# Altium PCB HM_RETI_Ambilight_v1_0.PcbDoc
Units mm, origin at the board's own origin, x right, y up, seen from the top; angles counter-clockwise.
Board outline 104.27 x 57.67 mm, 2 copper layers (Top Layer, Bottom Layer), stack 0.325 mm thick; 14 components, 11 nets, 87 pads, 2 vias.
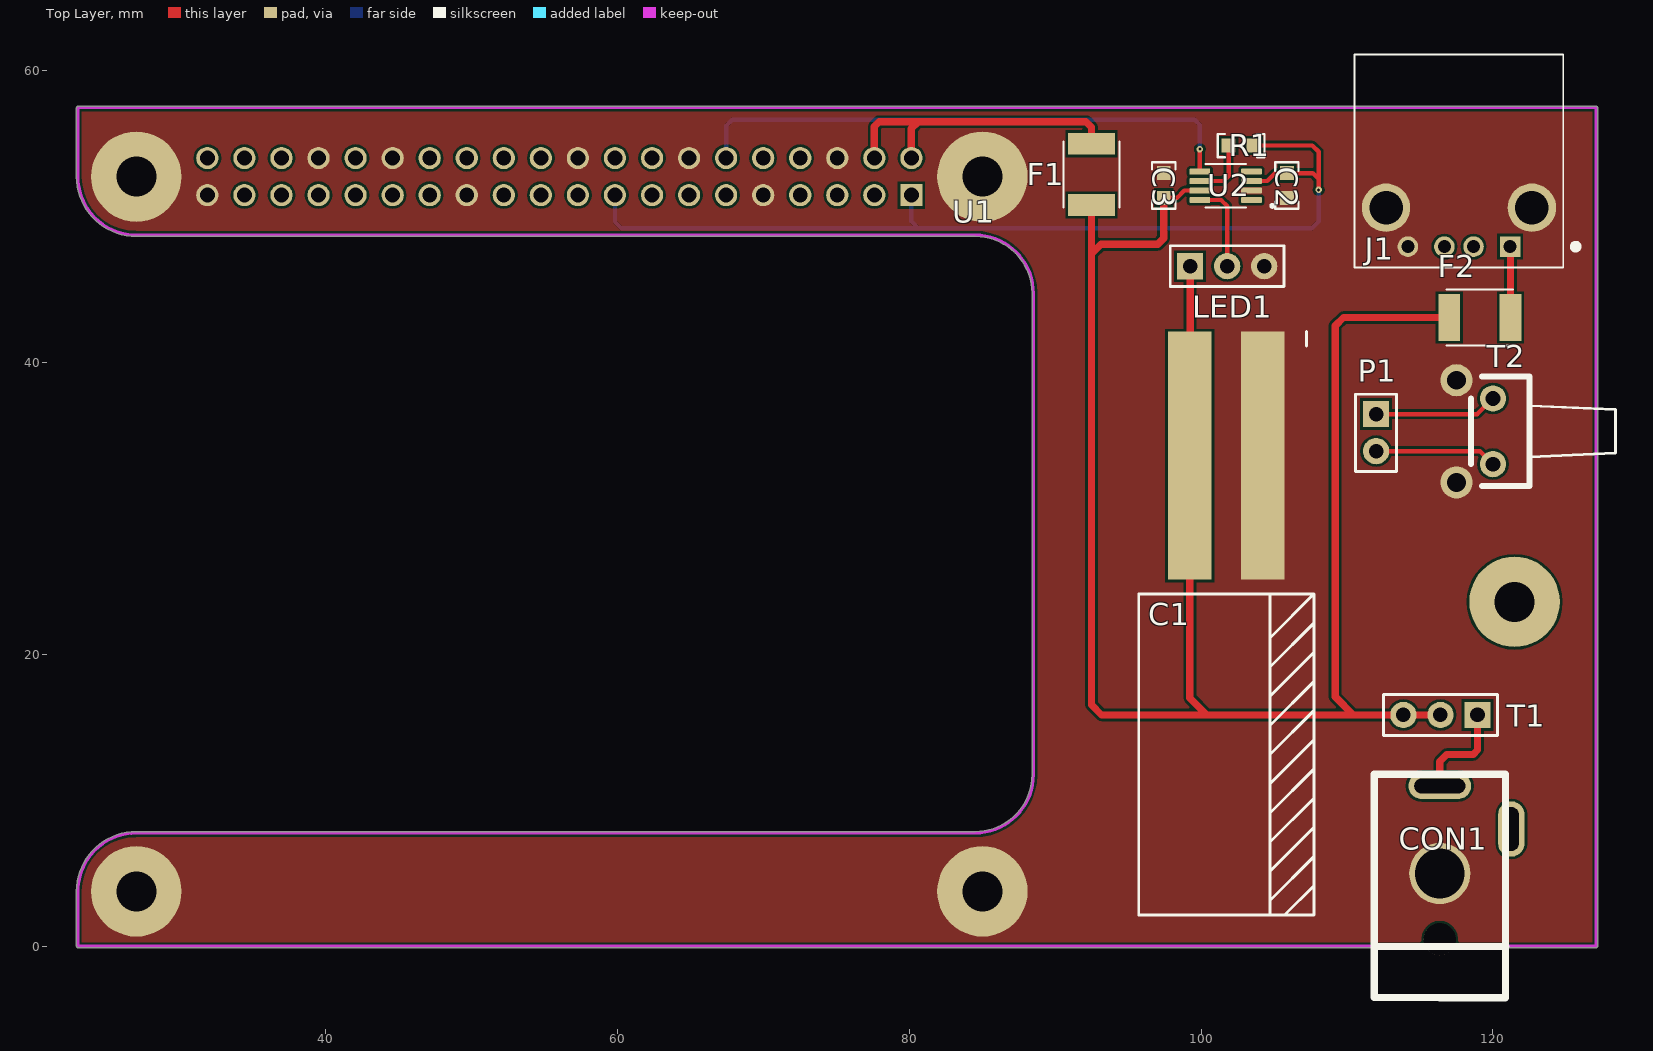
[diagram p0: Top Layer view]
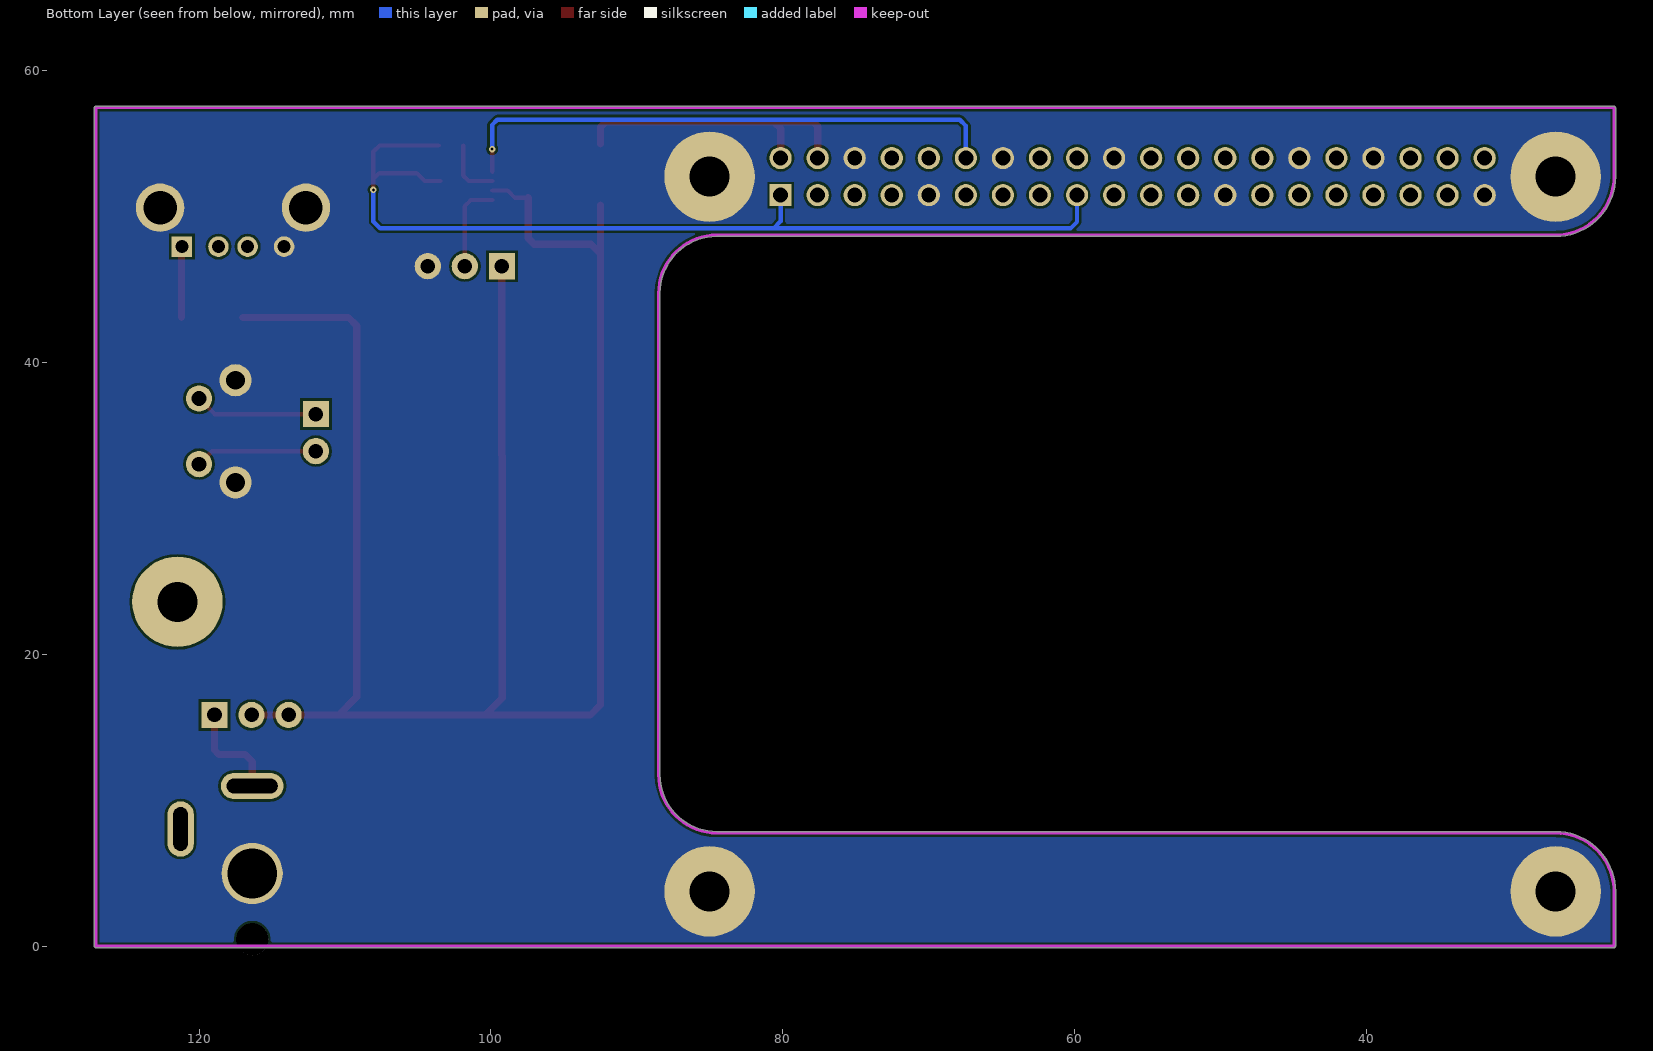
[diagram p1: Bottom Layer view, seen from below]
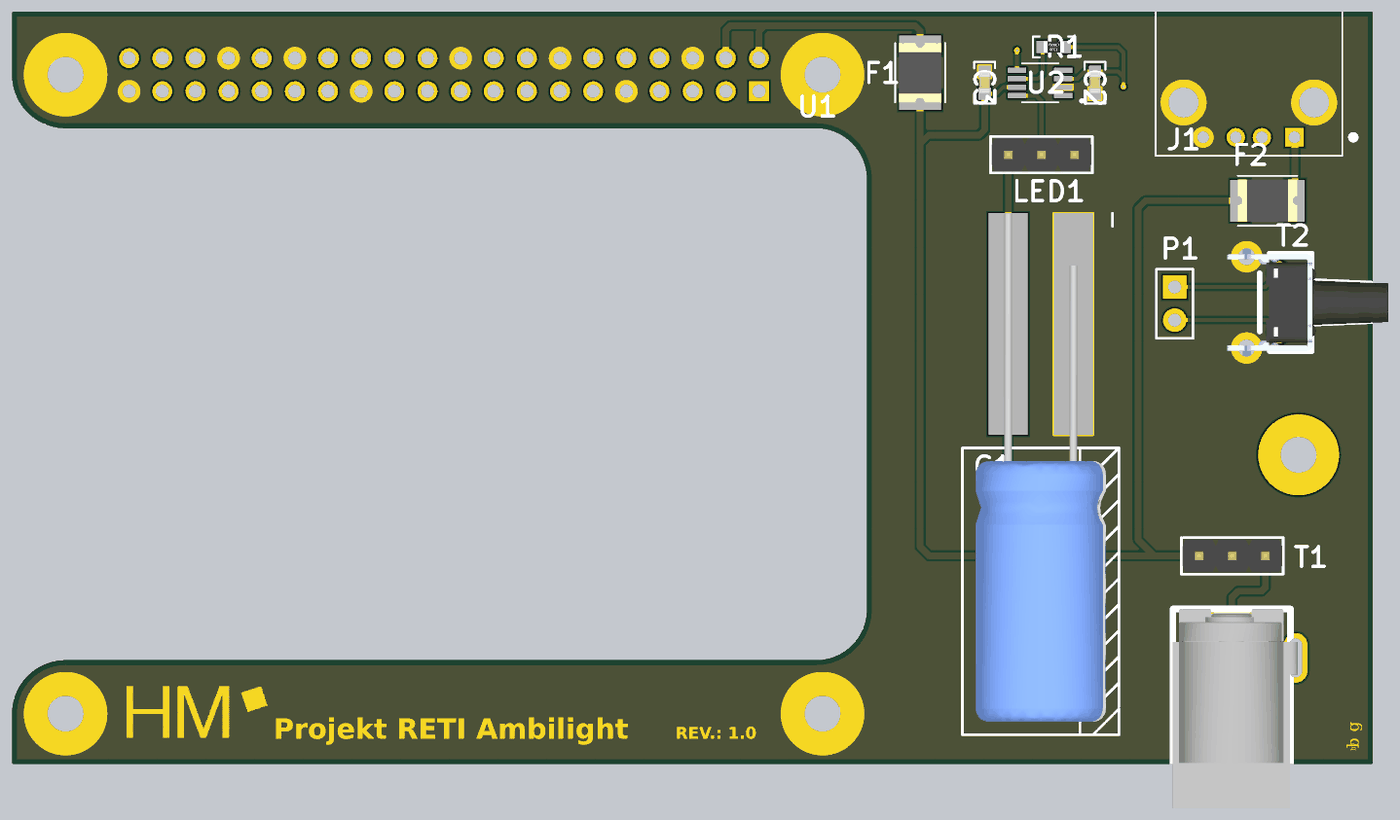
[diagram p2: 3D render of the assembled board from above, using the file's embedded part models]

## Layer stack, top to bottom
Top Solder: solder mask 0.0102, Solder Resist, Dk 3.5
Top Layer: signal copper 0.0356
Dielectric 1: core 0.254, FR-4, Dk 4.2
Bottom Layer: signal copper 0.0356
Bottom Solder: solder mask 0.0102, Solder Resist, Dk 3.5

## Board outline
22.916,0.015 cw(c23.015,0.03) 22.914,0.03 22.914,3.75 cw(c27.015,3.75) 27.015,7.851 cw(c27.015,7.75) 27.021,7.85 84.515,7.85 ccw(c84.515,11.75) 88.415,11.75 88.415,44.75 ccw(c84.515,44.75) 84.52,48.65 cw(c84.515,48.75) 84.515,48.65 27.021,48.65 cw(c27.015,48.75) 27.015,48.649 cw(c27.015,52.75) 22.914,52.75 22.914,57.47 cw(c23.015,57.47) 23.015,57.57 127.08,57.57 cw(c127.08,57.47) 127.18,57.47 127.18,0 cw(c127.08,0) 127.08,-0.1 23.015,-0.1 cw(c23.015,0)

## Design rules (kind name [scope] priority, off if disabled: settings)
Clearance [All] p1: gap=0.17
ComponentClearance [All] p1 off: gap=0.254 collisioncheckmode=3 verticalgap=0.254 showdistances=FALSE
Height [All] p1 off: minheight=0 maxheight=25.4 prefheight=12.7
HoleSize [All] p1: absolutevalues=TRUE maxlimit=5 minlimit=0.025 maxpercent=80.000 minpercent=20.000
MinimumSolderMaskSliver [All] p1: minsoldermaskwidth=0
PlaneClearance [All] p1: clearance=0.25
PlaneConnect [All] p1: planeconnectstyle=Direct reliefexpansion=0.508 reliefentries=4 reliefconductorwidth=0.254 reliefairgap=0.254
PolygonConnect [All] p1: connectstyle=Direct reliefconductorwidth=0.254 reliefentries=4 polygonreliefangle="90 Angle" airgapwidth=0.254
RoutingVias [All] p1: holewidth=0.2 width=0.45 viastyle="Through Hole" minholewidth=0.2 minwidth=0.45 maxholewidth=1 maxwidth=2
SilkToSilkClearance [All] p1: silktosilkclearance=0
SilkToSolderMaskClearance [IsPad] p1: minsilkscreentomaskgap=0 clearancetoexposedcopper=TRUE
SolderMaskExpansion SolderMaskExpansion_1 [IsVia] p1: expansion=-1
SolderMaskExpansion [All] p2: expansion=0.102
Width [All] p1: maxlimit=4 minlimit=0.12 preferedwidth=0.15 minimp=50.000000 maximp=50.000000 favimp=50.000000
22 further rules are at their usual default settings.

## Components (designator, comment, footprint, x,y, rotation, side; value= is the part's Value field where it differs from the comment)
C1 "1000uF" C_10mm_left 101.73,33.13 r180 top
C2 "100nF" C_0603 105.89,52.14 r270 top
C3 "100nF" C_0603 97.44,52.14 r90 top
CON1 "DC-BUCHSE" DC_BUCHSE_LUMBERG_2_35MM_STIFT 116.36,-3.53 r270 top
F1 "MF-MSMF250/16X-2" FUSER_MF-MSMF250/16X-2 92.49,52.9 r270 top
F2 "MF-MSMF110/16-2" FUSER_MF-MSMF250/16X-2 119.11,43.09 r180 top
J1 "UJ2-AH-4-TH" CUI_UJ2-AH-4-TH 121.18,47.95 r180 top
LED1 "Pin Header 3x1" "HEADER 3X1" 101.79,46.61 r0 top
P1 "Pin Header 2x1" "Header 2x1" 112,35.13 r270 top
R1 "1k" R_0603 102.74,54.88 r180 top
T1 "Pin Header 3x1" "Header 3x1" 116.41,15.85 r180 top
T2 "TASTER_RESET" 431256058736 120.01,35.29 r270 top
U1 "RASPBERRY_PI_3_MODEL_B+" MODULE_RASPBERRY_PI_3_MODEL_B+ 44.34,28.25 r0 top locked
U2 "TXS0102DCTT" SOP65P400X130-8N 101.69,52.12 r180 top

## Footprints (in the part's own frame and the unit in brackets; to place one, negate y for a bottom-side part, rotate by r counter-clockwise, add the part's x,y. Pads: shape width x height; smd on the part's side, far side on the other; paste and mask are expansions set on the pad)
431256058736 [mm] "Taster 90° 8,35mm"
  round 2.2 hole 1.3: BLECH1(-3.5,-2.5) BLECH2(3.5,-2.5)
  round 1.8 hole 1: PIN1(-2.25,0) PIN2(2.25,0)
  silkscreen extent -3.75,-1.5 3.75,8.4, body extent -4.2,-4 4.2,8.35, height 7.2
C_10mm_left [mm] "C_10mm, P=5mm"
  rect 3x17 smd: 1(2.5,-0.5) 2(-2.5,-0.5)
  silkscreen extent -6,-9 6,31, body extent -5,-8.99 5,29.99, height 10.24
C_0603 [mm] "C_0603"
  rect 0.95x0.95 smd: 1(-0.848,0) 2(0.848,0)
  silkscreen extent -1.6,-0.8 1.6,0.8, body extent -0.8,-0.4 0.8,0.4, height 0.79
CUI_UJ2-AH-4-TH [mm]
  rect 1.408x1.408 / inner round 1.408 / far side rect 1.408x1.408 hole 0.9: 1(0,0)
  round 1.408 hole 0.9: 2(2.5,0) 3(4.5,0) 4(7,0)
  round 3.316 hole 2.3: SH1(-1.5,-2.67) SH2(8.5,-2.67)
  silkscreen extent -4.7,-13.17 10.65,1.43
DC_BUCHSE_LUMBERG_2_35MM_STIFT [mm]
  round 2.2 hole 2.2 paste+0 mask+0.05: 0(-4,0)
  oval 1.8x4.3 hole 1 slot 3.5 at 90 deg paste+0 mask+0.05: 1(-14.51,0.01)
  oval 3.8x1.8 hole 1 slot 3 at 0 deg paste+0 mask+0.05: 2(-11.56,4.91)
  round 4.2 hole 3.4 paste+0 mask+0.05: 3(-8.51,0.01)
  silkscreen extent -15.31,-4.49 0,4.52, body extent -15.3,-4.52 0.01,5.08, height 11.05
FUSER_MF-MSMF250/16X-2 [mm]
  rect 1.5x3.2 smd: 1(-2.1,0) 2(2.1,0)
  silkscreen extent -2.27,-1.91 2.27,1.91, body extent -2.27,-1.62 2.27,1.62, height 0.85
"Header 2x1" [mm] "Header 2x1"
  rect 1.8x1.8 hole 1: 1(-1.34,0)
  round 1.8 hole 1: 2(1.2,0)
  silkscreen extent -2.7,-1.4 2.6,1.4
"HEADER 3X1" [mm] "Header 3x1"
  rect 1.8x1.8 hole 1: 1(-2.54,0)
  round 1.8 hole 1: 2(0,0) 3(2.54,0)
  silkscreen extent -3.9,-1.4 3.9,1.4, body extent -3.81,-1.26 3.81,1.28, height 8.55
"Header 3x1" [mm] "Header 3x1"
  rect 1.8x1.8 hole 1: 1(-2.54,0)
  round 1.8 hole 1: 2(0,0) 3(2.54,0)
  silkscreen extent -3.9,-1.4 3.9,1.4, body extent -3.81,-1.26 3.81,1.28, height 8.55
MODULE_RASPBERRY_PI_3_MODEL_B+ [mil]
  rect 60x60 hole 40: 1(1409.65,914.57)
  round 60 hole 40: 2(1409.65,1014.57) 3(1309.65,914.57) 4(1309.65,1014.57) 5(1209.65,914.57) 6(1209.65,1014.57) 7(1109.65,914.57) 8(1109.65,1014.57) 9(1009.65,914.57) 10(1009.65,1014.57) 11(909.65,914.57) 12(909.65,1014.57) 13(809.65,914.57) 14(809.65,1014.57) 15(709.65,914.57) 16(709.65,1014.57) 17(609.65,914.57) 18(609.65,1014.57) 19(509.65,914.57) 20(509.65,1014.57) 21(409.65,914.57) 22(409.65,1014.57) 23(309.65,914.57) 24(309.65,1014.57) 25(209.65,914.57) 26(209.65,1014.57) 27(109.65,914.57) 28(109.65,1014.57) 29(9.65,914.57) 30(9.65,1014.57) 31(-90.35,914.57) 32(-90.35,1014.57) 33(-190.35,914.57) 34(-190.35,1014.57) 35(-290.35,914.57) 36(-290.35,1014.57) 37(-390.35,914.57) 38(-390.35,1014.57) 39(-490.35,914.57) 40(-490.35,1014.57)
  round 244.09 hole 108.27: S1(1601.38,964.57) S2(-682.09,964.57) S3(-682.09,-964.57) S4(1601.38,-964.57)
R_0603 [mm] "R_0603"
  rect 0.95x0.95 smd: 1(-0.849,0) 2(0.849,0)
  silkscreen extent -1.6,-0.8 1.6,0.8, body extent -0.77,-0.42 0.78,0.43, height 0.45
SOP65P400X130-8N [mm]
  rrect25% 1.42x0.4 smd: 1(-1.77,0.975) 2(-1.77,0.325) 3(-1.77,-0.325) 4(-1.77,-0.975) 5(1.77,-0.975) 6(1.77,-0.325) 7(1.77,0.325) 8(1.77,0.975)
  silkscreen extent -3.29,-1.5 1.4,1.5

## Part data
C1: library part "C ELKO", "C, SMD, ELKO, 6,5V, ± 10%"
C2 C3: library part "C SMD", "C, SMD, MLCC, 25V, ± 10%"
CON1: library part DC_BUCHSE_LUMBERG_2_35mm_STIFT, "DC_BUCHSE_LUMBERG_2_35mm_STIFT"
F1: "Polymeric PTC Resettable Fuse 16V 2.5 A Ih Surface Mount 1812 (4532 Metric), Concave"
F2: library part MF-MSMF250/16X-2, "Polymeric PTC Resettable Fuse 16V 1.1 A Ih Surface Mount 1812 (4532 Metric), Concave"
J1: "Type A, USB 2.0, 1 A, Right Angle, Through Hole, USB Receptacle"
LED1 T1: "Board-to-Board-Steckverbinder, vertikal, 2.54 mm, 3 Kontakt(e), Stiftleiste, Baureihe WR-PHD"
P1: "Board-to-Board-Steckverbinder, vertikal, 2.54 mm, 2 Kontakt(e), Stiftleiste, Baureihe WR-PHD"
R1: library part "R SMD", "R, SMD, Chip, 100mW, ± 1%"
T2: "Taster, THT, 90°, 8,35mm, black"
U1: "BCM2835 Raspberry Pi Model B+ - ARM11, VideoCore MPU Embedded Evaluation Board"
U2: "2-Bit Bidirectional Voltage-Level Shifter for Open-Drain and Push-Pull Application"

## Free pads (board coordinates)
  round 6.2 hole 2.75: 0(121.49,23.6)

## Via types
v1: diameter 0.45, hole 0.2, Top Layer to Bottom Layer, 2 vias

## Nets (pads, with @x,y where several pads share a name; then routed paths per layer and width w, separated by ;. In a path a pad name is that pad's centre, name@x,y a point inside that pad or via, vN(x,y) a via of type N, cw(c..) or ccw(c..) an arc to the next point about the centre after c; other vN are vias at no path point)
3V3: C2.1 R1.1 U1.1 U1.17 U2.3 | length 67.4
  Top Layer w0.3: U2.3 104.535,52.445 105.079,52.989 C2.1 107.651,52.989 108.06,52.58 ; R1.1 107.63,54.88 108.06,54.45 108.06,52.58 ; v1(108.06,51.84) 108.06,52.58
  Bottom Layer w0.3: U1.17 59.825,49.645 60.27,49.2 80.63,49.2 ; U1.1 80.145,49.685 80.63,49.2 ; v1(108.06,51.84) 108.06,49.67 107.59,49.2 80.63,49.2
5V0: C1.1 C3.1 F1.2 F2.2 LED1.1 T1.2 T1.3 U2.7 | length 135.8
  Top Layer w0.3: C3.1 98.352,51.292 98.855,51.795 U2.7
  Top Layer w0.5: F1.2 92.49,47.46 ; C3.1 97.44,48.52 97.03,48.11 93.14,48.11 92.49,47.46 ; C1.1 99.23,17.01 100.39,15.85 ; C1.1@99.25,33.65 LED1.1 ; 110.43,15.85 109.19,17.09 109.19,42.52 109.76,43.09 F2.2 ; T1.2 T1.3 100.39,15.85 ; 92.49,47.46 92.49,16.54 93.18,15.85 100.39,15.85
DATA_LED: LED1.2 U2.8 | length 6.2
  Top Layer w0.3: U2.8 101.375,51.145 101.79,50.73 LED1.2
DATA_RPI: U1.12 U2.5 | length 38.2
  Top Layer w0.3: U2.5 v1(99.92,54.63)
  Bottom Layer w0.3: U1.12 67.445,56.225 67.87,56.65 99.56,56.65 99.92,56.29 v1(99.92,54.63)
GND: C1.2 C2.2 C3.2 CON1.3 J1.4 J1.SH1 J1.SH2 LED1.3 T2.BLECH1 T2.BLECH2 U1.6 U1.9 U1.14 U1.20 U1.25 U1.30 U1.34 U1.39 U1.S1 U1.S2 U1.S3 U1.S4 U2.2
NetCON1_1: CON1.1 T1.1 | length 7
  Top Layer w0.5: CON1.1 116.37,12.66 116.85,13.14 118.65,13.14 118.95,13.44 T1.1
NetF1_1: F1.1 U1.2 U1.4 | length 21.2
  Top Layer w0.5: U1.4 77.605,56.185 77.93,56.51 80.61,56.51 ; U1.2 80.145,56.045 80.61,56.51 ; F1.1 92.49,56.14 92.12,56.51 80.61,56.51
NetF2_1: F2.1 J1.1 | length 4.9
  Top Layer w0.5: F2.1 J1.1@121.21,47.95
NetP1_1: P1.1 T2.PIN1 | length 8.5
  Top Layer w0.3: P1.1 118.94,36.47 T2.PIN1
NetP1_2: P1.2 T2.PIN2 | length 8.4
  Top Layer w0.3: P1.2 119.12,33.93 T2.PIN2
NetR1_2: R1.2 U2.6 | length 4.2
  Top Layer w0.3: U2.6 101.525,52.445 101.891,52.811 R1.2
pads on no net: CON1.0 CON1.2 J1.2 J1.3 U1.3 U1.5 U1.7 U1.8 U1.10 U1.11 U1.13 U1.15 U1.16 U1.18 U1.19 U1.21 U1.22 U1.23 U1.24 U1.26 U1.27 U1.28 U1.29 U1.31 U1.32 U1.33 U1.35 U1.36 U1.37 U1.38 U1.40 U2.1 U2.4

## Polygon pours and split planes (outlines as drawn)
GND on Top Layer "Top Layer-No Net" (solid, remove dead copper, pour order 4): 22.916,0.015 cw(c23.015,0.03) 22.914,0.03 22.914,3.75 cw(c27.015,3.75) 27.015,7.851 cw(c27.015,7.75) 27.021,7.85 84.515,7.85 ccw(c84.515,11.75) 88.415,11.75 88.415,44.75 ccw(c84.515,44.75) 84.52,48.65 cw(c84.515,48.75) 84.515,48.65 27.021,48.65 cw(c27.015,48.75) 27.015,48.649 cw(c27.015,52.75) 22.914,52.75 22.914,57.47 cw(c23.015,57.47) 23.015,57.57 127.08,57.57 cw(c127.08,57.47) 127.18,57.47 127.18,0 cw(c127.08,0) 127.08,-0.1 23.015,-0.1 cw(c23.015,0)
GND on Bottom Layer "Top Layer-No Net1" (solid, remove dead copper, pour order 6): 22.916,0.015 cw(c23.015,0.03) 22.914,0.03 22.914,3.75 cw(c27.015,3.75) 27.015,7.851 cw(c27.015,7.75) 27.021,7.85 84.515,7.85 ccw(c84.515,11.75) 88.415,11.75 88.415,44.75 ccw(c84.515,44.75) 84.52,48.65 cw(c84.515,48.75) 84.515,48.65 27.021,48.65 cw(c27.015,48.75) 27.015,48.649 cw(c27.015,52.75) 22.914,52.75 22.914,57.47 cw(c23.015,57.47) 23.015,57.57 127.08,57.57 cw(c127.08,57.47) 127.18,57.47 127.18,0 cw(c127.08,0) 127.08,-0.1 23.015,-0.1 cw(c23.015,0)

## Keep-outs
Keep-Out Layer:
  lines w0.2: 23.015,0 127.08,0 127.08,57.47 23.015,57.47 23.015,52.75 ccw(c27.015,52.75) 27.015,48.75 84.515,48.75 cw(c84.515,44.75) 88.515,44.75 88.515,11.75 cw(c84.515,11.75) 84.515,7.75 27.015,7.75 ccw(c27.015,3.75) 23.015,3.75 23.015,0.03

## Silkscreen, mask and mechanical layers (free items; w line width, h text height)
Top Solder:
  drawing of 464 lines, arcs and shapes, not listed
  text "g" at 126.09,2.36 h1.75 r90
  text "Projekt RETI Ambilight" at 42.954,1.832 h3.05
  text "REV.: 1.0" at 73.744,1.832 h1.78
  text "b" at 126.09,1.11 h1.75 r90
  text "by" at 125.85,0.9 h0.75 r90
Mechanical 1:
  lines w0.2: 23.015,0 127.08,0 127.08,57.47 23.015,57.47 23.015,52.75 ccw(c27.015,52.75) 27.015,48.75 84.515,48.75 cw(c84.515,44.75) 88.515,44.75 88.515,11.75 cw(c84.515,11.75) 84.515,7.75 27.015,7.75 ccw(c27.015,3.75) 23.015,3.75 23.015,0.03 ; 259.3,106.45 259.3,106.45